# Altium PCB A_Flotador.PcbDoc
Units mm, origin at the board's own origin, x right, y up, seen from the top; angles counter-clockwise.
Board outline 75 x 30 mm, 2 copper layers (Top Layer, Bottom Layer), stack 1.671 mm thick; 19 components, 13 nets, 60 pads, 11 vias.
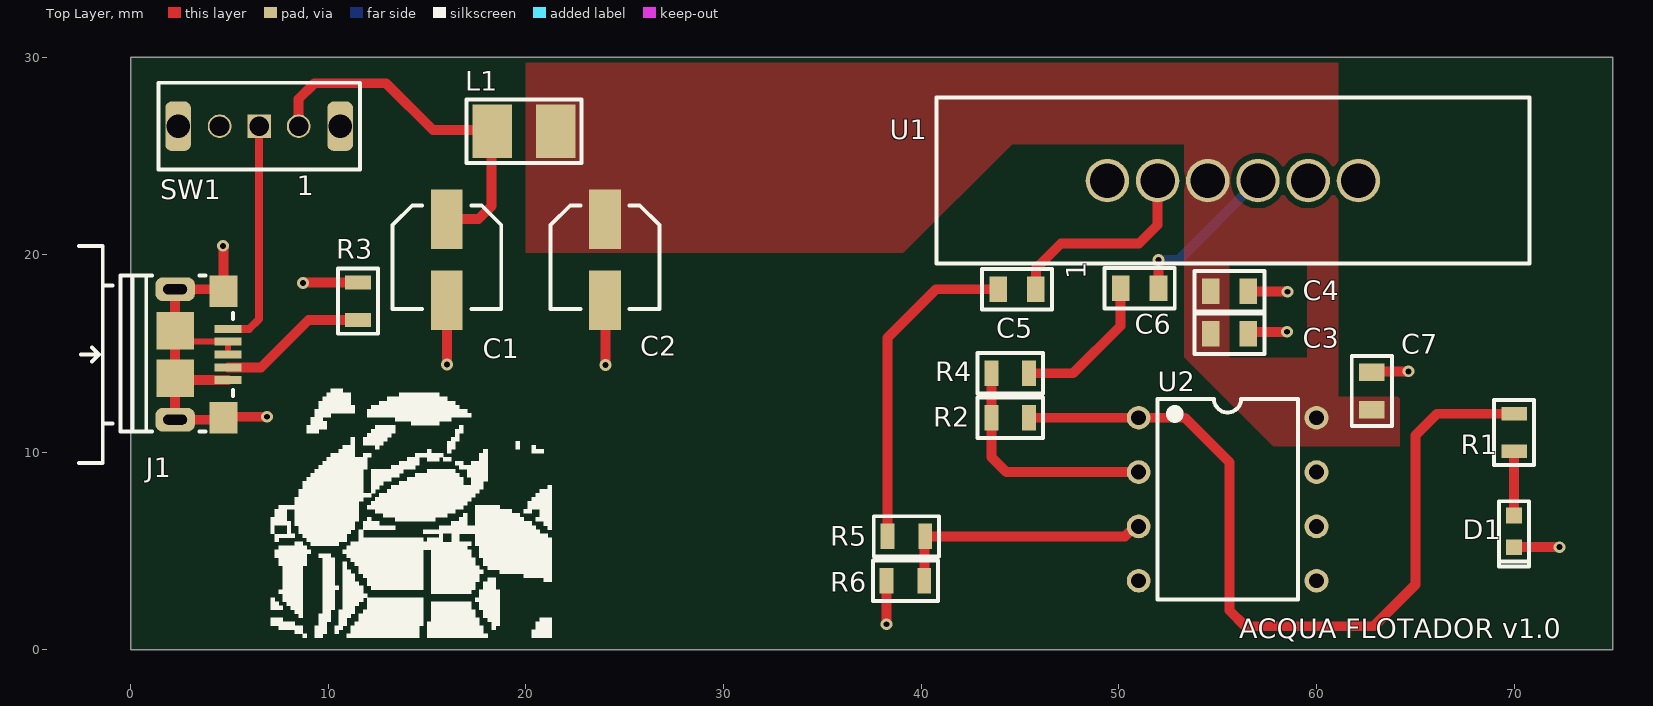
[diagram p0: Top Layer view]
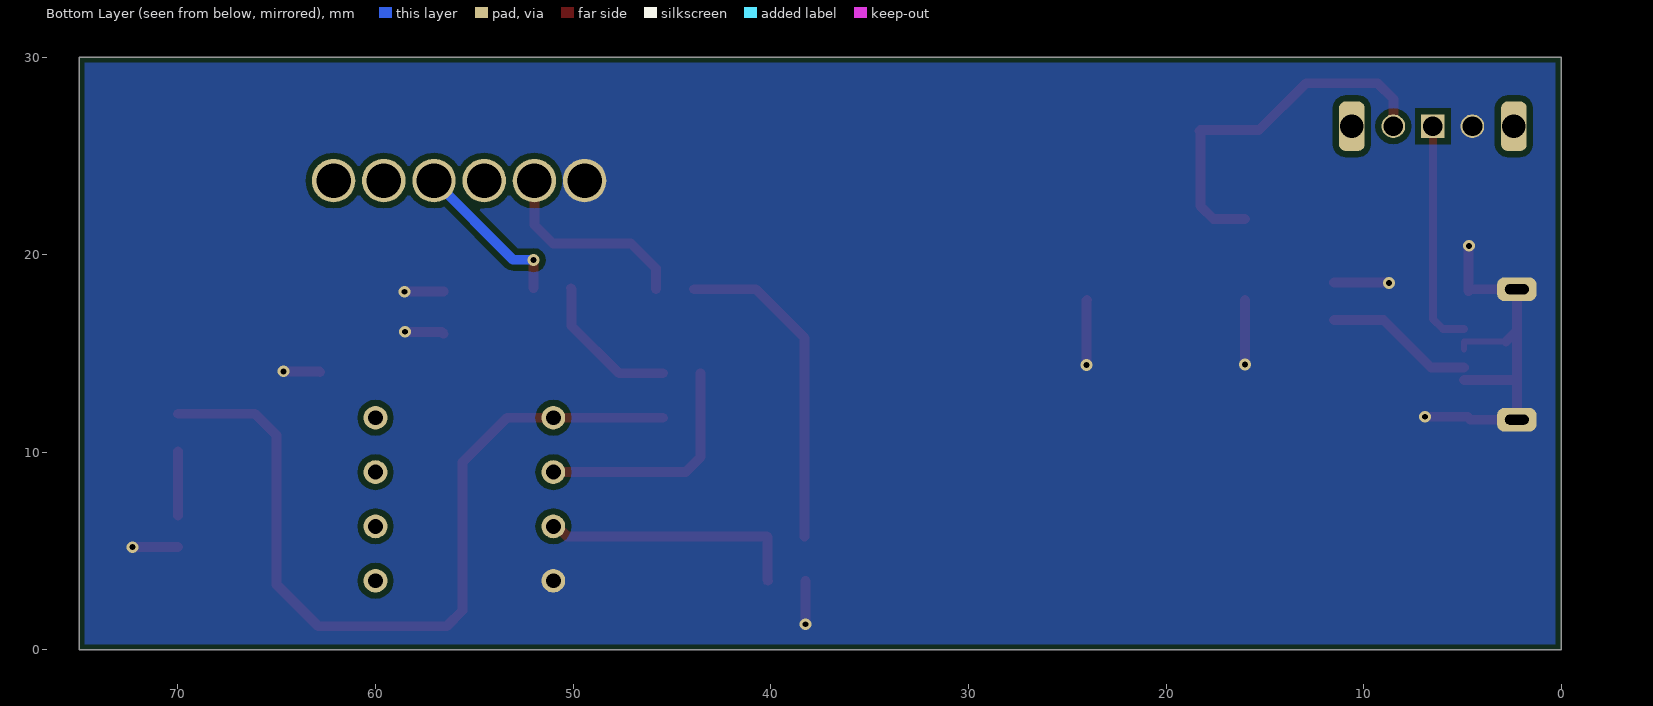
[diagram p1: Bottom Layer view, seen from below]
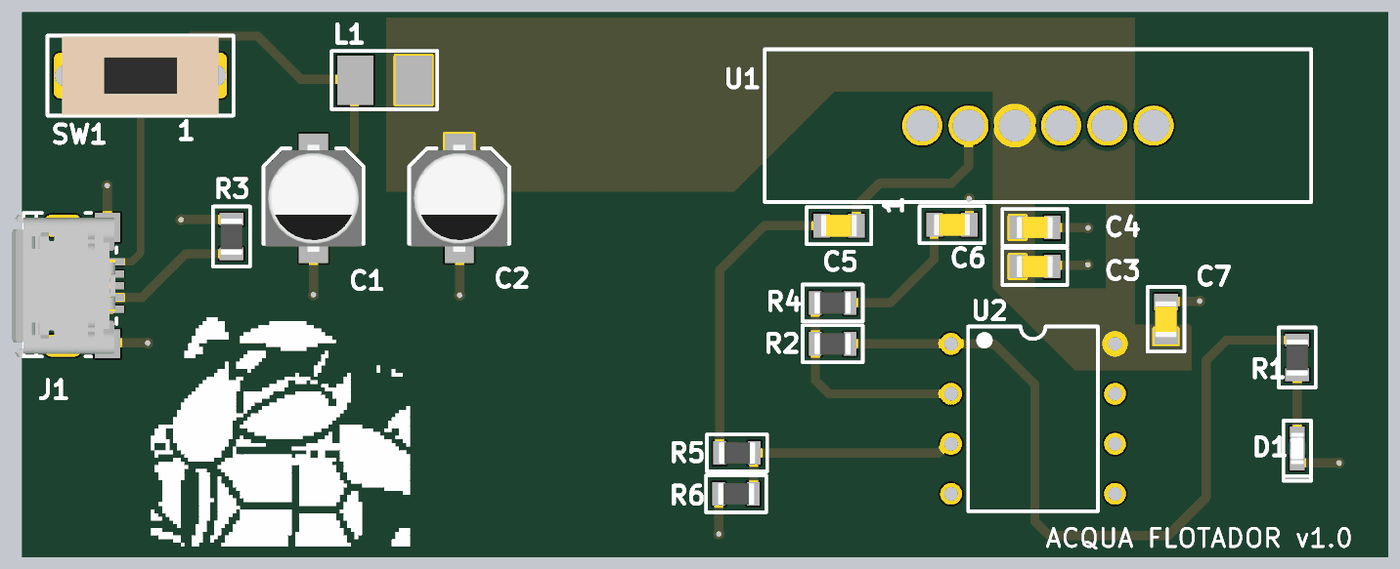
[diagram p2: 3D render of the assembled board from above, using the file's embedded part models]

## Layer stack, top to bottom
Top Solder: solder mask 0.0102, Solder Resist, Dk 3.5
Top Layer: signal copper 0.0356
Dielectric 1: dielectric 1.6, FR-4, Dk 4.8
Bottom Layer: signal copper 0.0356
Bottom Solder: solder mask 0.0102, Solder Resist, Dk 3.5

## Board outline
0,30 0,0 75,0 75,30

## Design rules (kind name [scope] priority, off if disabled: settings)
Clearance [All] p1: gap=0.3 ignorepadtopadclearanceinfootprint=FALSE
ComponentClearance [All] p1: gap=0.1 collisioncheckmode=3 verticalgap=0.1 showdistances=FALSE
PlaneConnect [All] p1: planeconnectstyle=Direct reliefexpansion=0.508 reliefentries=4 reliefconductorwidth=0.254 reliefairgap=0.254
PolygonConnect [All] p1: connectstyle=Direct reliefconductorwidth=0.254 reliefentries=4 polygonreliefangle="90 Angle" airgapwidth=0.254
RoutingVias [All] p1: holewidth=0.3 width=0.6 viastyle="Through Hole" minholewidth=0.3 minwidth=0.6 maxholewidth=0.3 maxwidth=0.6
SolderMaskExpansion [All] p1: expansion=0.102
Width [All] p1: maxlimit=1 minlimit=0.3 preferedwidth=0.5
28 further rules are at their usual default settings.

## Components (designator, comment, footprint, x,y, rotation, side; value= is the part's Value field where it differs from the comment)
C1 "100u / 10V" C_ALU_C_SIZE 16,19.75 r270 top
C2 "100u / 10V" C_ALU_C_SIZE 24,19.75 r270 top
C3 "1uF / 25V" C0805 55.6,16 r180 top
C4 "0.01uF / 50V" C0805 55.6,18.15 r180 top
C5 "470pF / 50V" C0805 44.85,18.25 r0 top
C6 "470pF / 50V" C0805 51.05,18.3 r0 top
C7 "0.01uF / 50V" C0805 62.8,13.1 r270 top
D1 "Green" LED_0603 70,6 r90 top
J1 "10118193-0001LF" MICROUSB 3.588,14.95 r270 top
L1 "2u2 / 2A" C1210_IND 19.9,26.25 r0 top
R1 "470R" R0805 70,11 r270 top
R2 "100k" R0805 44.5,11.75 r0 top
R3 "0R" R0805 11.5,17.65 r90 top
R4 "1k" R0805 44.5,14 r180 top
R5 "1k" R0805 39.25,5.75 r0 top
R6 "100k" R0805 39.2,3.5 r0 top
SW1 "SPDT" SPDT 6.5,26.5 r270 top
U1 "MPX5010DP" MPX5010DP 49.42,23.75 r90 top
U2 "LM358N" LM358N 51,11.75 r0 top

## Footprints (in the part's own frame and the unit in brackets; to place one, negate y for a bottom-side part, rotate by r counter-clockwise, add the part's x,y. Pads: shape width x height; smd on the part's side, far side on the other; paste and mask are expansions set on the pad)
C0805 [mm]
  rect 0.9x1.3 smd: 1(-0.95,0) 2(0.95,0)
  silkscreen extent -1.78,-1.02 1.78,1.02, body extent -1,-0.6 1,0.6, height 1.46
C1210_IND [mm]
  rect 2x2.7 smd: 1(-1.6,0) 2(1.6,0)
  silkscreen extent -2.9,-1.6 2.9,1.6, body extent -1.6,-1.25 1.6,1.25, height 2.7
C_ALU_C_SIZE [mm]
  rect 3x1.6 smd: 1(-2.05,0) 2(2.05,0)
  silkscreen extent -2.75,-2.75 2.5,2.75, body extent -2.95,-2.65 2.95,2.65, height 5.42
LED_0603 [mm]
  rect 0.8x0.8 smd: 1(-0.8,0) 2(0.8,0)
  silkscreen extent -1.78,-0.76 1.52,0.76, body extent -0.85,-0.4 0.85,0.4, height 0.67
LM358N [mm]
  round 1.2 hole 0.75: 1(0,0) 2(0,-2.75) 3(0,-5.5) 4(0,-8.25) 5(9,-8.25) 6(9,-5.5) 7(9,-2.75) 8(9,0)
  silkscreen extent 0.94,-9.21 8.06,0.95, body extent 0,-9.21 9,1.72, height 5.1
MICROUSB [mm]
  rect 0.4x1.35 smd mask+0.05: 1(-1.3,1.338) 2(-0.65,1.338) 3(0,1.338) 4(0.65,1.338) 5(1.3,1.338)
  rect 1.6x1.4 smd: 6(-3.2,1.112) 7(3.2,1.112)
  rrect60% 1.2x2 hole 0.5 slot 1.2 at 90 deg: 8(-3.3,-1.338) 9(3.3,-1.338)
  rect 1.9x1.9 smd: 10(-1.2,-1.338) 11(1.2,-1.338)
  silkscreen extent -5.5,-6.2 5.5,1.6, body extent -3.93,-4.12 3.93,1.54, height 2.87
MPX5010DP [mm]
  round 2.2 hole 1.75: 1(0,0) 2(0,-2.54) 3(0,-5.08) 4(0,-7.62) 5(0,-10.16) 6(0,-12.7)
  silkscreen extent -4.2,-21.35 4.2,8.65, body extent -4.2,-21.35 4.2,8.65, height 29.4
R0805 [mm]
  rect 0.7x1.3 smd: 1(-0.95,0) 2(0.95,0)
  silkscreen extent -1.65,-1.02 1.65,1.02, body extent -1,-0.6 1,0.6, height 0.71
SPDT [mm]
  round 1.2 hole 1: 1(0,2) 3(0,-2)
  rect 1.2x1.2 hole 1: 2(0,0)
  rrect50% 2.5x1.3 hole 1.2: 4(0,-4.1)
  rrect50% 2.5x1.3 hole 1.2 mask+0.102: 5(0,4.1)
  silkscreen extent -2.2,-5.1 2.2,5.1, body extent -2.15,-4.3 2.15,4.3, height 8

## Part data
C1 C2: library part EEE-1AA101WR, "Cap Aluminum 100uF 10V 20% (5 X 5.4mm) SMD 50mA 1000 hr 85°C T/R", Capacitance=100uF, Case/Package=Radial, Manufacturer=Panasonic, Max Operating Temperature=85°C, Min Operating Temperature=-40°C, Package Quantity=1, Ripple Current=50mA, Supplier Part Number 1=PCE3867CT-ND, Tolerance=20%, Voltage Rating=10V, ComponentLink1Description=https://datasheet.ciiva.com/26945/getdatasheetpartid-169213-26945071.pdf?src-supplier=Verical, ComponentLink1URL=https://datasheet.ciiva.com/26945/getdatasheetpartid-169213-26945071.pdf?src-supplier=Verical, ComponentLink2Description=https://datasheet.ciiva.com/2983/aba0000ce2-2983906.pdf?src-supplier=Avnet, ComponentLink2URL=https://datasheet.ciiva.com/2983/aba0000ce2-2983906.pdf?src-supplier=Avnet, ComponentLink3Description=https://datasheet.ciiva.com/24027/aba0000ce2-40801-24027541.pdf?src-supplier=Mouser, ComponentLink3URL=https://datasheet.ciiva.com/24027/aba0000ce2-40801-24027541.pdf?src-supplier=Mouser, ComponentLink4Description=https://datasheet.ciiva.com/30075/11aba0000ce2-30075303.pdf?src-supplier=Onlinecomponents.com, ComponentLink4URL=https://datasheet.ciiva.com/30075/11aba0000ce2-30075303.pdf?src-supplier=Onlinecomponents.com, ComponentLink5Description=https://datasheet.ciiva.com/16427/aba0000ce2-16427544.pdf?src-supplier=Future+Electronics, ComponentLink5URL=https://datasheet.ciiva.com/16427/aba0000ce2-16427544.pdf?src-supplier=Future+Electronics, ComponentLink6Description=https://datasheet.ciiva.com/14598/70255710-14598233.pdf?src-supplier=Allied+Electronics, ComponentLink6URL=https://datasheet.ciiva.com/14598/70255710-14598233.pdf?src-supplier=Allied+Electronics, ComponentLink7Description=https://datasheet.ciiva.com/14605/70255710-14605689.pdf?src-supplier=Allied+Electronics, ComponentLink7URL=https://datasheet.ciiva.com/14605/70255710-14605689.pdf?src-supplier=Allied+Electronics, ComponentLink8Description=https://datasheet.ciiva.com/11673/aba0000ce2-11673882.pdf?src-supplier=Avnet, ComponentLink8URL=https://datasheet.ciiva.com/11673/aba0000ce2-11673882.pdf?src-supplier=Avnet, Contact Plating=Tin, Diameter=5mm, Height=5.4mm, Height - Seated (Max)=0.213inch, Lead Free="Lead Free", Length=5.5mm, Life (Hours)=1000Hour, Manufacturer Part Number=EEE-1AA101WR, Mount="Surface Mount,PCB", Packaging="Tape and Reel", Pricing 1="1 = 0.32000, 10 = 0.22100, 100 = 0.13280, 500 = 0.09964 (USD)", Radiation Hardening=No, REACH SVHC=Unknown, Ripple Current (AC)=50mA, RoHS=Yes, Stock 1=121782, Supplier 1=Digi-Key, Termination=SMD/SMT, Voltage Rating (DC)=10V
C3: library part C2012X5R1E105K125AA, "CAP CER 1UF 25V X5R 0805", Capacitance=1uF, Case/Package=0805, Case Code (Metric)=2012, Dielectric=X5R, Dielectric Material=Ceramic, Manufacturer=TDK, Max Operating Temperature=85°C, Min Operating Temperature=-55°C, Package Quantity=2000, Supplier Part Number 1=445-1419-1-ND, Tolerance=10%, Voltage=25V, Case Code (Imperial)=0805, ComponentLink1Description=https://datasheet.ciiva.com/11787/0900766b80c1bb00-11787608.pdf?src-supplier=RSComponents, ComponentLink1URL=https://datasheet.ciiva.com/11787/0900766b80c1bb00-11787608.pdf?src-supplier=RSComponents, ComponentLink2Description=https://datasheet.ciiva.com/16449/e412-c-16449595.pdf?src-supplier=Future+Electronics, ComponentLink2URL=https://datasheet.ciiva.com/16449/e412-c-16449595.pdf?src-supplier=Future+Electronics, ComponentLink3Description=https://datasheet.ciiva.com/28602/1744655-28602171.pdf?src-supplier=Element14, ComponentLink3URL=https://datasheet.ciiva.com/28602/1744655-28602171.pdf?src-supplier=Element14, ComponentLink4Description=https://datasheet.ciiva.com/15192/getdatasheetpartid-726707-15192140.pdf?src-supplier=Verical, ComponentLink4URL=https://datasheet.ciiva.com/15192/getdatasheetpartid-726707-15192140.pdf?src-supplier=Verical, Composition=Ceramic, Depth=1.25mm, Height=1.25mm, Lead Free="Lead Free", Length=2mm, Manufacturer Part Number=C2012X5R1E105K125AA, Mount="Surface Mount", Number of Pins=2, Packaging="Tape and Reel", Pricing 1="1 = 0.27000, 10 = 0.18200, 100 = 0.09230, 500 = 0.06314, 1000 = 0.05586 (USD)", Radiation Hardening=No, REACH SVHC="No SVHC", RoHS=Yes, Stock 1=57325, Supplier 1=Digi-Key, Termination=SMD/SMT, Thickness=0.057inch, Voltage Rating=25V, Voltage Rating (DC)=25V, Weight=0.000194oz, Width=0.049inch
C4 C7: library part C0805C103K5RACTU, "CAP CER 0.01UF 50V X7R 0805", Capacitance=10nF, Case/Package=0805, Case Code (Metric)=2012, Dielectric=X7R, Manufacturer=KEMET, Max Operating Temperature=125°C, Min Operating Temperature=-55°C, Package Quantity=4000, Supplier Part Number 1=399-1158-1-ND, Tolerance=10%, Voltage=50V, Case Code (Imperial)=0805, ComponentLink1Description=http://www.onlinecomponents.com/productFiles/mf-KEM/kem_c1002_x7r_smd.pdf?src-supplier=Onlinecomponents.com, ComponentLink1URL=http://www.onlinecomponents.com/productFiles/mf-KEM/kem_c1002_x7r_smd.pdf?src-supplier=Onlinecomponents.com, ComponentLink2Description=http://components.arrow.com/part/dataview/0323_00011329?src-supplier=Arrow+Europe, ComponentLink2URL=http://components.arrow.com/part/dataview/0323_00011329?src-supplier=Arrow+Europe, ComponentLink3Description=https://www.verical.com/server-webapp/html/getDatasheet?partID=293414&src-supplier=Verical, ComponentLink3URL=https://www.verical.com/server-webapp/html/getDatasheet?partID=293414&src-supplier=Verical, ComponentLink4Description=http://www.farnell.com/datasheets/2315425.pdf?src-supplier=Farnell, ComponentLink4URL=http://www.farnell.com/datasheets/2315425.pdf?src-supplier=Farnell, ComponentLink5Description=http://www.kemet.com/Lists/ProductCatalog/Attachments/53/KEM_C1002_X7R_SMD.pdf?src-supplier=Avnet, ComponentLink5URL=http://www.kemet.com/Lists/ProductCatalog/Attachments/53/KEM_C1002_X7R_SMD.pdf?src-supplier=Avnet, ComponentLink6Description=http://www.farnell.com/datasheets/2121238.pdf?src-supplier=Element14, ComponentLink6URL=http://www.farnell.com/datasheets/2121238.pdf?src-supplier=Element14, ComponentLink7Description=https://api.kemet.com/component-edge/download/datasheet/C0805C103K5RACTU.pdf?src-supplier=Digi-Key, ComponentLink7URL=https://api.kemet.com/component-edge/download/datasheet/C0805C103K5RACTU.pdf?src-supplier=Digi-Key, Contact Plating=Tin,Matte, Depth=1.25mm, Height=0.78mm, Lead Pitch=0.75mm, Length=2mm, Manufacturer Part Number=C0805C103K5RACTU, Mount="Surface Mount", Packaging="Tape and Reel", Pricing 1="1 = 0.15000, 10 = 0.10500, 100 = 0.04950, 500 = 0.03474, 1000 = 0.02876 (USD)", Radiation Hardening=No, RoHS=Yes, Stock 1=3202760, Supplier 1=Digi-Key, Termination=SMD/SMT, Voltage Rating=50V, Voltage Rating (DC)=50V, Width=1.2mm
C5 C6: library part C0805C471K5RACTU, "CAP CER 470PF 50V X7R 0805", Capacitance=470pF, Case/Package=0805, Case Code (Metric)=2012, Dielectric=X7R, Dielectric Material=Ceramic, Manufacturer=KEMET, Max Operating Temperature=125°C, Min Operating Temperature=-55°C, Package Quantity=1, Supplier Part Number 1=399-1142-1-ND, Tolerance=10%, Voltage=50V, Case Code (Imperial)=0805, ComponentLink1Description=https://datasheet.ciiva.com/16624/datasheetpn-c0805c471k5ractu-16624899.pdf?src-supplier=Avnet+Europe, ComponentLink1URL=https://datasheet.ciiva.com/16624/datasheetpn-c0805c471k5ractu-16624899.pdf?src-supplier=Avnet+Europe, ComponentLink2Description=https://datasheet.ciiva.com/18193/getdatasheetpartid-344591-18193834.pdf?src-supplier=Verical, ComponentLink2URL=https://datasheet.ciiva.com/18193/getdatasheetpartid-344591-18193834.pdf?src-supplier=Verical, ComponentLink3Description=https://datasheet.ciiva.com/46446/1851736-46446251.pdf?src-supplier=Element14, ComponentLink3URL=https://datasheet.ciiva.com/46446/1851736-46446251.pdf?src-supplier=Element14, ComponentLink4Description=https://datasheet.ciiva.com/28614/kem-c1002-x7r-smd-28614760.pdf?src-supplier=Element14, ComponentLink4URL=https://datasheet.ciiva.com/28614/kem-c1002-x7r-smd-28614760.pdf?src-supplier=Element14, Depth=1.25mm, Dissipation Factor=2.5%, Height=0.78mm, Lead Pitch=0.75mm, Length=2mm, Manufacturer Part Number=C0805C471K5RACTU, Mount="Surface Mount", Number of Pins=2, Packaging="Tape and Reel", Pricing 1="1 = 0.12000, 10 = 0.09000, 100 = 0.04030, 500 = 0.02876, 1000 = 0.02260 (USD)", Radiation Hardening=No, REACH SVHC="No SVHC", RoHS=Yes, Stock 1=229830, Supplier 1=Digi-Key, Termination=SMD/SMT, Thickness=0.035inch, Voltage Rating=50V, Voltage Rating (DC)=50V, Width=1.2mm
D1: library part LGL29K-G2J1-24-Z, "LED Uni-Color Green 572nm 2-Pin Chip 0603(1608Metric) T/R", Case/Package=0603, Case Code (Metric)=1608, Forward Current=20mA, Forward Voltage=2.2V, Lens Color=White, Manufacturer="Osram Opto", Max Operating Temperature=100°C, Min Operating Temperature=-40°C, Package Quantity=5000, Reverse Voltage=12V, Supplier Part Number 1=475-2709-1-ND, Test Current=2mA, Case Code (Imperial)=0603, Color=Green, ComponentLink1Description=https://datasheet.ciiva.com/4689/g-l29k-39844-4689584.pdf?src-supplier=Mouser, ComponentLink1URL=https://datasheet.ciiva.com/4689/g-l29k-39844-4689584.pdf?src-supplier=Mouser, ComponentLink2Description=https://datasheet.ciiva.com/15198/getdatasheetpartid-571127-15198411.pdf?src-supplier=Verical, ComponentLink2URL=https://datasheet.ciiva.com/15198/getdatasheetpartid-571127-15198411.pdf?src-supplier=Verical, ComponentLink3Description=https://datasheet.ciiva.com/2112/00077107-0-2112887.pdf?src-supplier=Digi-Key, ComponentLink3URL=https://datasheet.ciiva.com/2112/00077107-0-2112887.pdf?src-supplier=Digi-Key, ComponentLink4Description=https://datasheet.ciiva.com/2112/00077107-0-2112888.pdf?src-supplier=Digi-Key, ComponentLink4URL=https://datasheet.ciiva.com/2112/00077107-0-2112888.pdf?src-supplier=Digi-Key, ComponentLink5Description=https://datasheet.ciiva.com/2112/00077107-0-2112886.pdf?src-supplier=Digi-Key, ComponentLink5URL=https://datasheet.ciiva.com/2112/00077107-0-2112886.pdf?src-supplier=Digi-Key, Depth=0.8mm, Dominant Wavelength=570nm, Height=0.65mm, Illumination Color=Green, Length=1.3mm, Lens Size=0.8mm, Lens Style=Flat,Diffused,Colorless,Rectangular, Lens Transparency=Diffused, Luminous Flux=0.012lm, Luminous Intensity=5.6mcd, Manufacturer Part Number=LGL29K-G2J1-24-Z, Mount="Surface Mount", Number of Elements=1, Number of LEDs=1, Number of Pins=2, Packaging="Tape and Reel", Pricing 1="1 = 0.50000, 10 = 0.36300, 100 = 0.23730, 500 = 0.17054, 1000 = 0.13347, 2500 = 0.12235 (USD)", Radiation Hardening=No, RoHS=Yes, Stock 1=129040, Supplier 1=Digi-Key, Viewing Angle=160°, Width=0.8mm
J1: "CONN RCPT USB2.0 MICRO B SMD R/A", Color=Black, Current Rating=1.8A, Flammability Rating="UL94 V-0", Insulation Resistance=1GR, Manufacturer="Amphenol FCI", Max Operating Temperature=85°C, Max Voltage Rating (AC)=100V, Min Operating Temperature=-55°C, Package Quantity=1200, Supplier Part Number 1=609-4616-1-ND, ComponentLink1Description=https://datasheet.ciiva.com/851/10118193-851106.pdf?src-supplier=Digi-Key, ComponentLink1URL=https://datasheet.ciiva.com/851/10118193-851106.pdf?src-supplier=Digi-Key, ComponentLink2Description=https://datasheet.ciiva.com/14802/10118193-0001lf-webpage-14802386.pdf?src-supplier=Arrow, ComponentLink2URL=https://datasheet.ciiva.com/14802/10118193-0001lf-webpage-14802386.pdf?src-supplier=Arrow, ComponentLink3Description=https://datasheet.ciiva.com/26853/getdatasheetpartid-418618-26853893.pdf?src-supplier=Verical, ComponentLink3URL=https://datasheet.ciiva.com/26853/getdatasheetpartid-418618-26853893.pdf?src-supplier=Verical, ComponentLink4Description=https://datasheet.ciiva.com/4598/10118193ac-197151-4598799.pdf?src-supplier=Mouser, ComponentLink4URL=https://datasheet.ciiva.com/4598/10118193ac-197151-4598799.pdf?src-supplier=Mouser, ComponentLink5Description=https://datasheet.ciiva.com/851/10118193-851107.pdf?src-supplier=Digi-Key, ComponentLink5URL=https://datasheet.ciiva.com/851/10118193-851107.pdf?src-supplier=Digi-Key, ComponentLink6Description=https://datasheet.ciiva.com/851/10118193-851108.pdf?src-supplier=Digi-Key, ComponentLink6URL=https://datasheet.ciiva.com/851/10118193-851108.pdf?src-supplier=Digi-Key, ComponentLink7Description=https://datasheet.ciiva.com/14618/70236827-14618887.pdf?src-supplier=Allied+Electronics, ComponentLink7URL=https://datasheet.ciiva.com/14618/70236827-14618887.pdf?src-supplier=Allied+Electronics, Connector Type=USB,Receptacle, Contact Material="Copper Alloy", Contact Plating=Gold, Depth=5.67mm, Features=Shielded, Gender=Female, Housing Material=Polymer, Length=7.86mm, Manufacturer Part Number=10118193-0001LF, Mount="Surface Mount,Horizontal", Number of Contacts=5, Number of Ports=1, Number of Terminals=5, Orientation="Right Angle", Packaging="Tape and Reel", Pitch=0.65mm, Pricing 1="1 = 0.43000, 10 = 0.40500, 25 = 0.36440, 50 = 0.32400, 100 = 0.31040, 250 = 0.28344, 500 = 0.26994 (USD)", Radiation Hardening=No, RoHS=Yes, Stock 1=150983, Supplier 1=Digi-Key, Termination=Solder, Voltage Rating=100V
L1: library part L1210R2R2MDWIT, "FIXED IND 2.2UH 2A 80 MOHM SMD", Case/Package=1210, Case Code (Metric)=3225, Current Rating=2A, DC Current=1.13A, DC Resistance (DCR)=80mR, Inductance=2.2uH, Inductance Tolerance=20%, Manufacturer=KEMET, Max Operating Temperature=105°C, Min Operating Temperature=-40°C, Package Quantity=1000, Self Resonant Frequency=190MHz, Supplier Part Number 1=399-9598-1-ND, Test Frequency=100kHz, Case Code (Imperial)=1210, ComponentLink1Description=https://datasheet.ciiva.com/17280/f3115-17280270.pdf?src-supplier=Avnet+Europe, ComponentLink1URL=https://datasheet.ciiva.com/17280/f3115-17280270.pdf?src-supplier=Avnet+Europe, ComponentLink2Description=https://datasheet.ciiva.com/22685/27262-22685038.pdf?src-supplier=Element14, ComponentLink2URL=https://datasheet.ciiva.com/22685/27262-22685038.pdf?src-supplier=Element14, ComponentLink3Description=https://datasheet.ciiva.com/4957/f3115-4957838.pdf?src-supplier=Mouser, ComponentLink3URL=https://datasheet.ciiva.com/4957/f3115-4957838.pdf?src-supplier=Mouser, ComponentLink4Description=https://datasheet.ciiva.com/6691/f3115-6691487.pdf?src-supplier=Digi-Key, ComponentLink4URL=https://datasheet.ciiva.com/6691/f3115-6691487.pdf?src-supplier=Digi-Key, ComponentLink5Description=https://datasheet.ciiva.com/8512/f3115-8512543.pdf?src-supplier=Avnet, ComponentLink5URL=https://datasheet.ciiva.com/8512/f3115-8512543.pdf?src-supplier=Avnet, Composition=Wirewound,Ceramic, Core Material=Ferrite, Depth=2.7mm, Height=2.5mm, Height - Seated (Max)=0.106inch, Length=0.126inch, Manufacturer Part Number=L1210R2R2MDWIT, Max DC Current=2A, Military Standard=Not, Mount="Surface Mount", Packaging="Tape and Reel", Pricing 1="1 = 0.55000, 10 = 0.47900, 100 = 0.34210, 500 = 0.28738 (USD)", Radiation Hardening=No, REACH SVHC="No SVHC", RoHS=Yes, Shielding=Unshielded, Stock 1=14739, Supplier 1=Digi-Key, Termination=SMD/SMT, Tolerance=20%, Width=0.098inch
R1: library part RC0805FR-07470RL, "RES SMD 470 OHM 1% 1/8W 0805", Case/Package=0805, Case Code (Metric)=2012, Manufacturer=Yageo, Max Operating Temperature=155°C, Max Power Dissipation=125mW, Min Operating Temperature=-55°C, Package Quantity=1, Supplier Part Number 1=311-470CRCT-ND, Temperature Coefficient=100ppm/°C, Tolerance=1%, Voltage Rating=150V, Case Code (Imperial)=0805, ComponentLink1Description=https://datasheet.ciiva.com/2457/pyu-r-int-thick-7-2457056.pdf?src-supplier=Digi-Key, ComponentLink1URL=https://datasheet.ciiva.com/2457/pyu-r-int-thick-7-2457056.pdf?src-supplier=Digi-Key, ComponentLink2Description=https://datasheet.ciiva.com/2457/pyu-r-int-thick-7-2457057.pdf?src-supplier=Digi-Key, ComponentLink2URL=https://datasheet.ciiva.com/2457/pyu-r-int-thick-7-2457057.pdf?src-supplier=Digi-Key, ComponentLink3Description=https://datasheet.ciiva.com/2457/pyu-r-int-thick-7-2457058.pdf?src-supplier=Digi-Key, ComponentLink3URL=https://datasheet.ciiva.com/2457/pyu-r-int-thick-7-2457058.pdf?src-supplier=Digi-Key, ComponentLink4Description=https://datasheet.ciiva.com/7941/444164-7941797.pdf?src-supplier=Element14, ComponentLink4URL=https://datasheet.ciiva.com/7941/444164-7941797.pdf?src-supplier=Element14, ComponentLink5Description=https://datasheet.ciiva.com/7941/444164-7941798.pdf?src-supplier=Element14, ComponentLink5URL=https://datasheet.ciiva.com/7941/444164-7941798.pdf?src-supplier=Element14, ComponentLink6Description=https://datasheet.ciiva.com/46447/444164-46447580.pdf?src-supplier=Element14, ComponentLink6URL=https://datasheet.ciiva.com/46447/444164-46447580.pdf?src-supplier=Element14, ComponentLink7Description=https://datasheet.ciiva.com/16745/rc0805-16745229.pdf?src-supplier=Future+Electronics, ComponentLink7URL=https://datasheet.ciiva.com/16745/rc0805-16745229.pdf?src-supplier=Future+Electronics, Composition="Thick Film", Depth=1.25mm, Features="Moisture Resistant", Height=0.5mm, Lead Free="Lead Free", Lead Pitch=0.4mm, Length=2mm, Manufacturer Part Number=RC0805FR-07470RL, Military Standard=Not, Number of Pins=2, Number of Terminations=2, Packaging="Tape and Reel", Power Rating=125mW, Pricing 1="1 = 0.10000, 10 = 0.04000, 100 = 0.01630, 1000 = 0.00731, 2500 = 0.00635 (USD)", REACH SVHC=Unknown, Resistance=470R, RoHS=Yes, Stock 1=1101328, Supplier 1=Digi-Key, Termination=SMD/SMT, Voltage Rating (DC)=150V, Width=1.25mm
R2 R6: library part RC0805FR-07100KL, "RES SMD 100K OHM 1% 1/8W 0805", Case/Package=0805, Case Code (Metric)=2012, Manufacturer=Yageo, Max Operating Temperature=155°C, Max Power Dissipation=125mW, Min Operating Temperature=-55°C, Package Quantity=1, Resistance=100kR, Supplier Part Number 1=311-100KCRCT-ND, Temperature Coefficient=100ppm/°C, Tolerance=1%, Voltage Rating=150V, Case Code (Imperial)=0805, ComponentLink1Description=https://datasheet.ciiva.com/11808/0900766b8106beab-11808858.pdf?src-supplier=RSComponents, ComponentLink1URL=https://datasheet.ciiva.com/11808/0900766b8106beab-11808858.pdf?src-supplier=RSComponents, ComponentLink2Description=https://datasheet.ciiva.com/2457/pyu-r-int-thick-7-2457017.pdf?src-supplier=Digi-Key, ComponentLink2URL=https://datasheet.ciiva.com/2457/pyu-r-int-thick-7-2457017.pdf?src-supplier=Digi-Key, ComponentLink3Description=https://datasheet.ciiva.com/12667/rc0805-12667001.pdf?src-supplier=Mouser, ComponentLink3URL=https://datasheet.ciiva.com/12667/rc0805-12667001.pdf?src-supplier=Mouser, ComponentLink4Description=https://datasheet.ciiva.com/2457/pyu-r-int-thick-7-2457018.pdf?src-supplier=Digi-Key, ComponentLink4URL=https://datasheet.ciiva.com/2457/pyu-r-int-thick-7-2457018.pdf?src-supplier=Digi-Key, ComponentLink5Description=https://datasheet.ciiva.com/16747/rc0805-16747226.pdf?src-supplier=Future+Electronics, ComponentLink5URL=https://datasheet.ciiva.com/16747/rc0805-16747226.pdf?src-supplier=Future+Electronics, ComponentLink6Description=https://datasheet.ciiva.com/2457/pyu-r-int-thick-7-2457019.pdf?src-supplier=Digi-Key, ComponentLink6URL=https://datasheet.ciiva.com/2457/pyu-r-int-thick-7-2457019.pdf?src-supplier=Digi-Key, ComponentLink7Description=https://datasheet.ciiva.com/7660/38627-7660796.pdf?src-supplier=Element14, ComponentLink7URL=https://datasheet.ciiva.com/7660/38627-7660796.pdf?src-supplier=Element14, ComponentLink8Description=https://datasheet.ciiva.com/7941/1697719-7941676.pdf?src-supplier=Element14, ComponentLink8URL=https://datasheet.ciiva.com/7941/1697719-7941676.pdf?src-supplier=Element14, ComponentLink9Description=https://datasheet.ciiva.com/7941/1686128-7941677.pdf?src-supplier=Element14, ComponentLink9URL=https://datasheet.ciiva.com/7941/1686128-7941677.pdf?src-supplier=Element14, ComponentLink10Description=https://datasheet.ciiva.com/7941/1697719-7941678.pdf?src-supplier=Element14, ComponentLink10URL=https://datasheet.ciiva.com/7941/1697719-7941678.pdf?src-supplier=Element14, ComponentLink11Description=https://datasheet.ciiva.com/22747/444164-22747534.pdf?src-supplier=Element14, ComponentLink11URL=https://datasheet.ciiva.com/22747/444164-22747534.pdf?src-supplier=Element14, Composition="Thick Film", Depth=1.25mm, Features="Moisture Resistant", Height=0.024inch, Lead Free="Lead Free", Lead Pitch=0.4mm, Length=2mm, Manufacturer Part Number=RC0805FR-07100KL, Military Standard=Not, Number of Pins=2, Number of Terminations=2, Packaging="Tape and Reel", Power Rating=125mW, Pricing 1="1 = 0.10000, 10 = 0.03800, 100 = 0.01550, 1000 = 0.00694, 2500 = 0.00603 (USD)", REACH SVHC=Unknown, RoHS=Yes, Stock 1=7766985, Supplier 1=Digi-Key, Termination=SMD/SMT, Voltage Rating (DC)=150V, Width=0.049inch
R3: library part RC0805JR-070RL, "RES SMD 0 OHM JUMPER 1/8W 0805", Case/Package=0805, Case Code (Metric)=2012, Manufacturer=Yageo, Max Operating Temperature=155°C, Min Operating Temperature=-55°C, Power Rating=125mW, Resistance=0mR, Supplier Part Number 1=311-0.0ARCT-ND, Temperature Coefficient=200ppm/°C, Tolerance=5%, Voltage Rating=150V, Case Code (Imperial)=0805, ComponentLink1Description=https://datasheet.ciiva.com/7941/1738694-7941861.pdf?src-supplier=Element14, ComponentLink1URL=https://datasheet.ciiva.com/7941/1738694-7941861.pdf?src-supplier=Element14, ComponentLink2Description=https://datasheet.ciiva.com/11819/0900766b8106beab-11819430.pdf?src-supplier=RSComponents, ComponentLink2URL=https://datasheet.ciiva.com/11819/0900766b8106beab-11819430.pdf?src-supplier=RSComponents, ComponentLink3Description=https://datasheet.ciiva.com/7941/1738694-7941862.pdf?src-supplier=Element14, ComponentLink3URL=https://datasheet.ciiva.com/7941/1738694-7941862.pdf?src-supplier=Element14, ComponentLink4Description=https://datasheet.ciiva.com/7941/1738694-7941863.pdf?src-supplier=Element14, ComponentLink4URL=https://datasheet.ciiva.com/7941/1738694-7941863.pdf?src-supplier=Element14, ComponentLink5Description=https://datasheet.ciiva.com/15190/getdatasheetpartid-330685-15190028.pdf?src-supplier=Verical, ComponentLink5URL=https://datasheet.ciiva.com/15190/getdatasheetpartid-330685-15190028.pdf?src-supplier=Verical, Composition="Thick Film", Contact Plating=Tin,Matte, Depth=1.25mm, Height=0.5mm, Lead Free="Lead Free", Length=2mm, Manufacturer Part Number=RC0805JR-070RL, Military Standard=Not, Number of Pins=2, Packaging="Tape and Reel", Pricing 1="1 = 0.10000, 10 = 0.03800, 25 = 0.02760, 50 = 0.02100, 100 = 0.01540, 250 = 0.01180, 500 = 0.00942, 1000 = 0.00694 (USD)", Radiation Hardening=No, REACH SVHC=Unknown, RoHS=Yes, Stock 1=13963017, Supplier 1=Digi-Key, Termination=SMD/SMT, Voltage Rating (DC)=150V, Width=1.25mm
R4 R5: library part RC0805FR-071KL, "RES SMD 1K OHM 1% 1/8W 0805", Case/Package=0805, Manufacturer="Yageo Phycomp", Max Operating Temperature=155°C, Min Operating Temperature=-55°C, Power Rating=125mW, Resistance=1000R, Supplier Part Number 1=311-1.00KCRCT-ND, Temperature Coefficient=100ppm/°C, Tolerance=1%, Voltage Rating (DC)=150V, ComponentLink1Description=http://www.farnell.com/datasheets/2167052.pdf?src-supplier=Farnell, ComponentLink1URL=http://www.farnell.com/datasheets/2167052.pdf?src-supplier=Farnell, ComponentLink2Description=http://www.mouser.com/ds/2/447/Yageo_08112016_RC0805-968729.pdf?src-supplier=Mouser, ComponentLink2URL=http://www.mouser.com/ds/2/447/Yageo_08112016_RC0805-968729.pdf?src-supplier=Mouser, ComponentLink3Description=http://www.yageo.com/documents/recent/PYu-RC_Group_51_RoHS_L_10.pdf?src-supplier=Digi-Key, ComponentLink3URL=http://www.yageo.com/documents/recent/PYu-RC_Group_51_RoHS_L_10.pdf?src-supplier=Digi-Key, ComponentLink4Description=http://www.farnell.com/datasheets/2167052.pdf?src-supplier=Newark, ComponentLink4URL=http://www.farnell.com/datasheets/2167052.pdf?src-supplier=Newark, ComponentLink5Description=http://www.farnell.com/datasheets/1697719.pdf?src-supplier=Element14, ComponentLink5URL=http://www.farnell.com/datasheets/1697719.pdf?src-supplier=Element14, Depth=1.25mm, Height=0.5mm, Lead Free="Lead Free", Length=2mm, Manufacturer Part Number=RC0805FR-071KL, Mount="Surface Mount", Number of Pins=2, Packaging="Cut Tape", Pricing 1="1 = 0.10000, 10 = 0.03700, 100 = 0.01490, 1000 = 0.00668, 2500 = 0.00580 (USD)", REACH SVHC="No SVHC", RoHS=Yes, Stock 1=26091057, Supplier 1=Digi-Key, Width=1.25mm
SW1: library part OS102011MS2QN1, "C & K COMPONENTS         OS102011MS2QN1             Slide Switch, SPDT, On-On, Through Hole, OS Series, 100 mA", Contact Current Rating=100mA, Contact Resistance=20mR, Insulation Resistance=100MR, Manufacturer="ITT C&K", Max Operating Temperature=70°C, Max Voltage Rating (DC)=12V, Min Operating Temperature=-30°C, Package Quantity=300, Supplier Part Number 1=CKN9565-ND, Actuator Length=4mm, Actuator Material=Polyoxymethylene,Acetal,Polyacetal, Actuator Type=Standard, ComponentLink1Description=https://datasheet.ciiva.com/30466/0900766b81263f61-30466806.pdf?src-supplier=RSComponents, ComponentLink1URL=https://datasheet.ciiva.com/30466/0900766b81263f61-30466806.pdf?src-supplier=RSComponents, ComponentLink2Description=https://datasheet.ciiva.com/16298/os102011ms2qn1-16298526.pdf?src-supplier=Future+Electronics, ComponentLink2URL=https://datasheet.ciiva.com/16298/os102011ms2qn1-16298526.pdf?src-supplier=Future+Electronics, ComponentLink3Description=https://datasheet.ciiva.com/1532/1683358-1532308.pdf?src-supplier=Element14, ComponentLink3URL=https://datasheet.ciiva.com/1532/1683358-1532308.pdf?src-supplier=Element14, ComponentLink4Description=https://datasheet.ciiva.com/2889/os-19jan15-2889173.pdf?src-supplier=Digi-Key, ComponentLink4URL=https://datasheet.ciiva.com/2889/os-19jan15-2889173.pdf?src-supplier=Digi-Key, ComponentLink5Description=https://datasheet.ciiva.com/1699/os-19jan15-1699479.pdf?src-supplier=Newark, ComponentLink5URL=https://datasheet.ciiva.com/1699/os-19jan15-1699479.pdf?src-supplier=Newark, ComponentLink6Description=https://datasheet.ciiva.com/18147/getdatasheetpartid-320490-18147210.pdf?src-supplier=Verical, ComponentLink6URL=https://datasheet.ciiva.com/18147/getdatasheetpartid-320490-18147210.pdf?src-supplier=Verical, ComponentLink7Description=https://datasheet.ciiva.com/16997/70128245-16997771.pdf?src-supplier=Allied+Electronics, ComponentLink7URL=https://datasheet.ciiva.com/16997/70128245-16997771.pdf?src-supplier=Allied+Electronics, ComponentLink8Description=https://datasheet.ciiva.com/26290/os-11mar13-26290652.pdf?src-supplier=Onlinecomponents.com, ComponentLink8URL=https://datasheet.ciiva.com/26290/os-11mar13-26290652.pdf?src-supplier=Onlinecomponents.com, Contact Material="Copper Alloy,Brass,Silver", Contact Plating=Silver,Gold, Current Rating=100mA, Depth=4.3mm, Electrical Life=10000Cycles, Housing Material=Resin, Lead Free="Lead Free", Length=8.6mm, Manufacturer Part Number=OS102011MS2QN1, Max Current Rating=100mA, Mechanical Life=10000Cycles, Mount="Through Hole,PCB", Orientation=Vertical, Packaging=Bulk, Pricing 1="1 = 0.43000, 10 = 0.41300, 25 = 0.40480, 50 = 0.36160, 100 = 0.34440, 250 = 0.33580, 500 = 0.28414, 1000 = 0.27552, 5000 = 0.24108 (USD)", Radiation Hardening=No, REACH SVHC="No SVHC", RoHS=Yes, Stock 1=21108, Supplier 1=Digi-Key, Switch Function=On-On, Switch Travel=2mm, Termination="PC Pins", Throw Configuration=SPDT, Voltage Rating (DC)=12V
U1: "NXP         MPX5010DP             Pressure Sensor, Differential, 450 mV/kPa, 0 kPa, 10 kPa, 4.75 V, 5.25 V", Case/Package=SIP, Manufacturer="NXP Freescale", Max Operating Temperature=125°C, Max Supply Voltage=5.25V, Min Operating Temperature=-40°C, Min Supply Voltage=4.75V, Nominal Supply Current=5mA, Operating Pressure=1.45PSI, Operating Supply Voltage=5V, Output Voltage=4.7V, Package Quantity=100, Supplier Part Number 1=MPX5010DP-ND, Accuracy=5%, ComponentLink1Description=https://datasheet.ciiva.com/14094/rkmotorola-drucksensor-en-14094760.pdf?src-supplier=Distrelec, ComponentLink1URL=https://datasheet.ciiva.com/14094/rkmotorola-drucksensor-en-14094760.pdf?src-supplier=Distrelec, ComponentLink2Description=https://datasheet.ciiva.com/26929/mpx5010dp-26929428.pdf?src-supplier=IIIC, ComponentLink2URL=https://datasheet.ciiva.com/26929/mpx5010dp-26929428.pdf?src-supplier=IIIC, ComponentLink3Description=https://datasheet.ciiva.com/2825/mpx5010-2825379.pdf?src-supplier=Digi-Key, ComponentLink3URL=https://datasheet.ciiva.com/2825/mpx5010-2825379.pdf?src-supplier=Digi-Key, ComponentLink4Description=https://datasheet.ciiva.com/16373/mpx5010-16373114.pdf?src-supplier=Future+Electronics, ComponentLink4URL=https://datasheet.ciiva.com/16373/mpx5010-16373114.pdf?src-supplier=Future+Electronics, ComponentLink5Description=https://datasheet.ciiva.com/1513/1738898-1513837.pdf?src-supplier=Element14, ComponentLink5URL=https://datasheet.ciiva.com/1513/1738898-1513837.pdf?src-supplier=Element14, Halogen Free="Not Halogen Free", Lead Free="Lead Free", Manufacturer Part Number=MPX5010DP, Max Pressure=5.8PSI, Mount="Through Hole", Number of Pins=6, Output Type="Analog Voltage,Analog", Packaging=Tray, Port Style=Barbed, Pressure Type=Differential, Pricing 1="1 = 16.33000, 10 = 13.33200, 25 = 12.33200, 100 = 10.33230, 500 = 9.66570, 1000 = 9.16575 (USD)", Radiation Hardening=No, REACH SVHC="No SVHC", Response Time=1ms, RoHS=Yes, Stock 1=0, Supplier 1=Digi-Key, Termination=PCB, Weight=0.184887oz
U2: library part LM358N/NOPB, "IC OPAMP GP 1MHZ 8DIP", Case/Package=PDIP, Input Bias Current=250nA, Input Offset Voltage (Vos)=7mV, Manufacturer="TI National Semiconductor", Max Dual Supply Voltage=16V, Max Operating Temperature=70°C, Max Power Dissipation=830mW, Max Supply Current=1.2mA, Max Supply Voltage=32V, Min Dual Supply Voltage=1.5V, Min Operating Temperature=0°C, Min Supply Voltage=3V, Nominal Supply Current=500uA, Operating Supply Current=1mA, Output Current=30mA, Output Current per Channel=40mA, Package Quantity=40, Power Supply Rejection Ratio (PSRR)=65dB, Supplier Part Number 1=LM358NNS/NOPB-ND, Voltage Gain=100dB, Bandwidth=1MHz, Common Mode Rejection Ratio=65dB, ComponentLink1Description=https://datasheet.ciiva.com/19474/839367-19474437.pdf?src-supplier=Jameco, ComponentLink1URL=https://datasheet.ciiva.com/19474/839367-19474437.pdf?src-supplier=Jameco, ComponentLink2Description=https://datasheet.ciiva.com/22769/1696812-22769451.pdf?src-supplier=Farnell, ComponentLink2URL=https://datasheet.ciiva.com/22769/1696812-22769451.pdf?src-supplier=Farnell, ComponentLink3Description=https://datasheet.ciiva.com/26850/lm358n-nopb-26850548.pdf?src-supplier=IIIC, ComponentLink3URL=https://datasheet.ciiva.com/26850/lm358n-nopb-26850548.pdf?src-supplier=IIIC, ComponentLink4Description=https://datasheet.ciiva.com/2973/lm2904-n-2973398.pdf?src-supplier=Avnet, ComponentLink4URL=https://datasheet.ciiva.com/2973/lm2904-n-2973398.pdf?src-supplier=Avnet, ComponentLink5Description=https://datasheet.ciiva.com/8009/28655-8009196.pdf?src-supplier=Element14, ComponentLink5URL=https://datasheet.ciiva.com/8009/28655-8009196.pdf?src-supplier=Element14, ComponentLink6Description=https://datasheet.ciiva.com/14151/ohlmx58-lm2904-e-14151404.pdf?src-supplier=Distrelec, ComponentLink6URL=https://datasheet.ciiva.com/14151/ohlmx58-lm2904-e-14151404.pdf?src-supplier=Distrelec, ComponentLink7Description=https://datasheet.ciiva.com/6625/lm158-n-6625621.pdf?src-supplier=Digi-Key, ComponentLink7URL=https://datasheet.ciiva.com/6625/lm158-n-6625621.pdf?src-supplier=Digi-Key, ComponentLink8Description=https://datasheet.ciiva.com/26061/lm2904-n-26061750.pdf?src-supplier=Avnet+Europe, ComponentLink8URL=https://datasheet.ciiva.com/26061/lm2904-n-26061750.pdf?src-supplier=Avnet+Europe, Gain Bandwidth Product=1MHz, Height=3.3mm, Lead Free="Lead Free", Length=9.27mm, Manufacturer Part Number=LM358N/NOPB, Mount="Through Hole", Number of Amplifiers=2, Number of Channels=2, Number of Circuits=2, Number of Elements=2, Number of Pins=8, Operating Supply Voltage=16V, Packaging=Rail/Tube, Power Dissipation=830mW, Pricing 1="1 = 0.84000, 10 = 0.75500, 25 = 0.71680, 100 = 0.55040, 500 = 0.46080, 1000 = 0.35840, 2500 = 0.34048, 5000 = 0.32768 (USD)", Radiation Hardening=No, REACH SVHC="No SVHC", RoHS=Yes, Slew Rate=0.1V/µs, Stock 1=3167, Supplier 1=Digi-Key, Unity Gain Bandwidth Product=1MHz, Weight=0.01lb, Width=6.35mm

## Via types
v1: diameter 0.6, hole 0.3, Top Layer to Bottom Layer, tented both sides, 11 vias

## Nets (pads, with @x,y where several pads share a name; then routed paths per layer and width w, separated by ;. In a path a pad name is that pad's centre, name@x,y a point inside that pad or via, vN(x,y) a via of type N, cw(c..) or ccw(c..) an arc to the next point about the centre after c; other vN are vias at no path point)
+5V: C2.1 C3.2 C4.2 C7.2 L1.2 U1.3 U2.8
GND: C1.2 C2.2 C3.1 C4.1 C7.1 D1.1 J1.2 J1.3 J1.5 J1.6 J1.7 J1.8 J1.9 J1.10 J1.11 R3.2 R6.1 SW1.3 U1.1 U2.4 | length 41.8
  Top Layer w0.3: J1.10@2.8,15.6 J1.2 4.925,15.2
  Top Layer w0.5: J1.10@2.8,15.6 J1.10 ; v1(4.675,20.45) 4.688,20.437 J1.6@4.688,18.162 ; J1.6 J1.6@4.688,18.162 ; J1.5 2.35,13.65 J1.11 ; v1(6.9,11.8) 4.75,11.8 J1.7 4.6,11.65 J1.9 J1.11 ; v1(8.725,18.575) 8.737,18.587 11.487,18.587 R3.2 ; v1(16,14.45) C1.2 ; C2.2 24.025,17.675 v1(24.025,14.425) ; v1(38.25,1.3) R6.1 ; C3.1 56.631,16.081 58.493,16.081 v1(58.513,16.1) ; C4.1 56.562,18.137 58.513,18.137 v1(58.525,18.125) ; C7.1 62.831,14.081 64.631,14.081 v1(64.65,14.1) ; D1.1 v1(72.3,5.2) ; J1.11 J1.10 ; J1.10 J1.8 4.6,18.25 J1.6@4.688,18.162
NetC1_1: C1.1 L1.1 SW1.1 | length 18.9
  Top Layer w0.5: SW1.1 8.5,27.88 9.296,28.677 12.923,28.677 15.3,26.3 L1.1@18.25,26.3 ; C1.1 17.6,21.8 18.25,22.45 L1.1@18.25,26.3 ; L1.1 L1.1@18.25,26.3
NetC5_1: C5.1 R5.1 | length 16.7
  Top Layer w0.5: R5.1 38.3,15.8 40.75,18.25 C5.1
NetC5_2: C5.2 U1.2 | length 10.4
  Top Layer w0.5: C5.2 45.8,19.3 47.075,20.575 51.025,20.575 51.96,21.51 U1.2
NetC6_1: C6.1 R4.1 | length 7.5
  Top Layer w0.5: R4.1 47.675,14 50.075,16.4 50.075,18.275 C6.1
NetC6_2: C6.2 U1.4 | length 8.1
  Top Layer w0.5: C6.2 v1(52,19.725)
  Bottom Layer w0.5: v1(52,19.725) 52.019,19.744 53.034,19.744 U1.4
NetD1_2: D1.2 R1.2 | length 3.2
  Top Layer w0.5: D1.2 R1.2
NetJ1_1: J1.1 SW1.2 | length 11.5
  Top Layer w0.4: J1.1 6,16.25 6.5,16.75 SW1.2
NetJ1_4: J1.4 R3.1 | length 7.6
  Top Layer w0.5: J1.4 6.6,14.3 9,16.7 R3.1
NetR1_1: R1.1 R2.2 U2.1 | length 42.2
  Top Layer w0.5: R2.2 U2.1 53.35,11.75 55.6,9.5 55.6,1.993 56.393,1.2 62.9,1.2 65,3.3 65,10.85 66.1,11.95 R1.1
NetR2_1: R2.1 R4.2 U2.2 | length 12
  Top Layer w0.5: R4.2 R2.1 43.55,9.75 44.3,9 U2.2
NetR5_2: R5.2 R6.2 U2.3 | length 13.3
  Top Layer w0.5: R6.2 40.175,3.525 40.175,5.725 R5.2 50.311,5.75 50.811,6.25 U2.3
pads on no net: SW1.4 SW1.5 U1.5 U1.6 U2.5 U2.6 U2.7

## Polygon pours and split planes (outlines as drawn)
GND on Bottom Layer "Bottom Layer-GND" (solid, remove dead copper, pour order 2): 0.3,29.7 0.3,0.3 74.7,0.3 74.7,29.7
+5V on Top Layer (solid, remove dead copper, pour order 4): 20,29.7 20,20.1 39.1,20.1 44.6,25.6 53.3,25.6 53.3,14.8 57.8,10.3 64.2,10.3 64.2,12.7 64.1,12.8 61.1,12.8 61.1,29.7

## Other copper
Top Layer:
  pour cut-out: 55.6,19.6 55.6,14.8 59.5,14.8 59.5,19.6

## Silkscreen, mask and mechanical layers (free items; w line width, h text height)
Top Overlay:
  drawing of 20 lines, arcs and shapes, not listed
  text "ACQUA FLOTADOR v1.0" at 56.1,0.6 h1
Board Outline:
  the board outline again, w0.1

## Text inside footprints (layer, text, board x,y; h text height)
SW1: Top Overlay "1" at 8.4,23 h1
U1: Top Overlay "1" at 48.32,18.75 h1 r90